# Altium PCB PANEL.PcbDoc
Units mm, origin at the board's own origin, x right, y up, seen from the top; angles counter-clockwise.
Board outline 82 x 85 mm, 2 copper layers (Top Layer, Bottom Layer), stack 1.57 mm thick; 4 components, 0 nets, 8 pads, 0 vias.
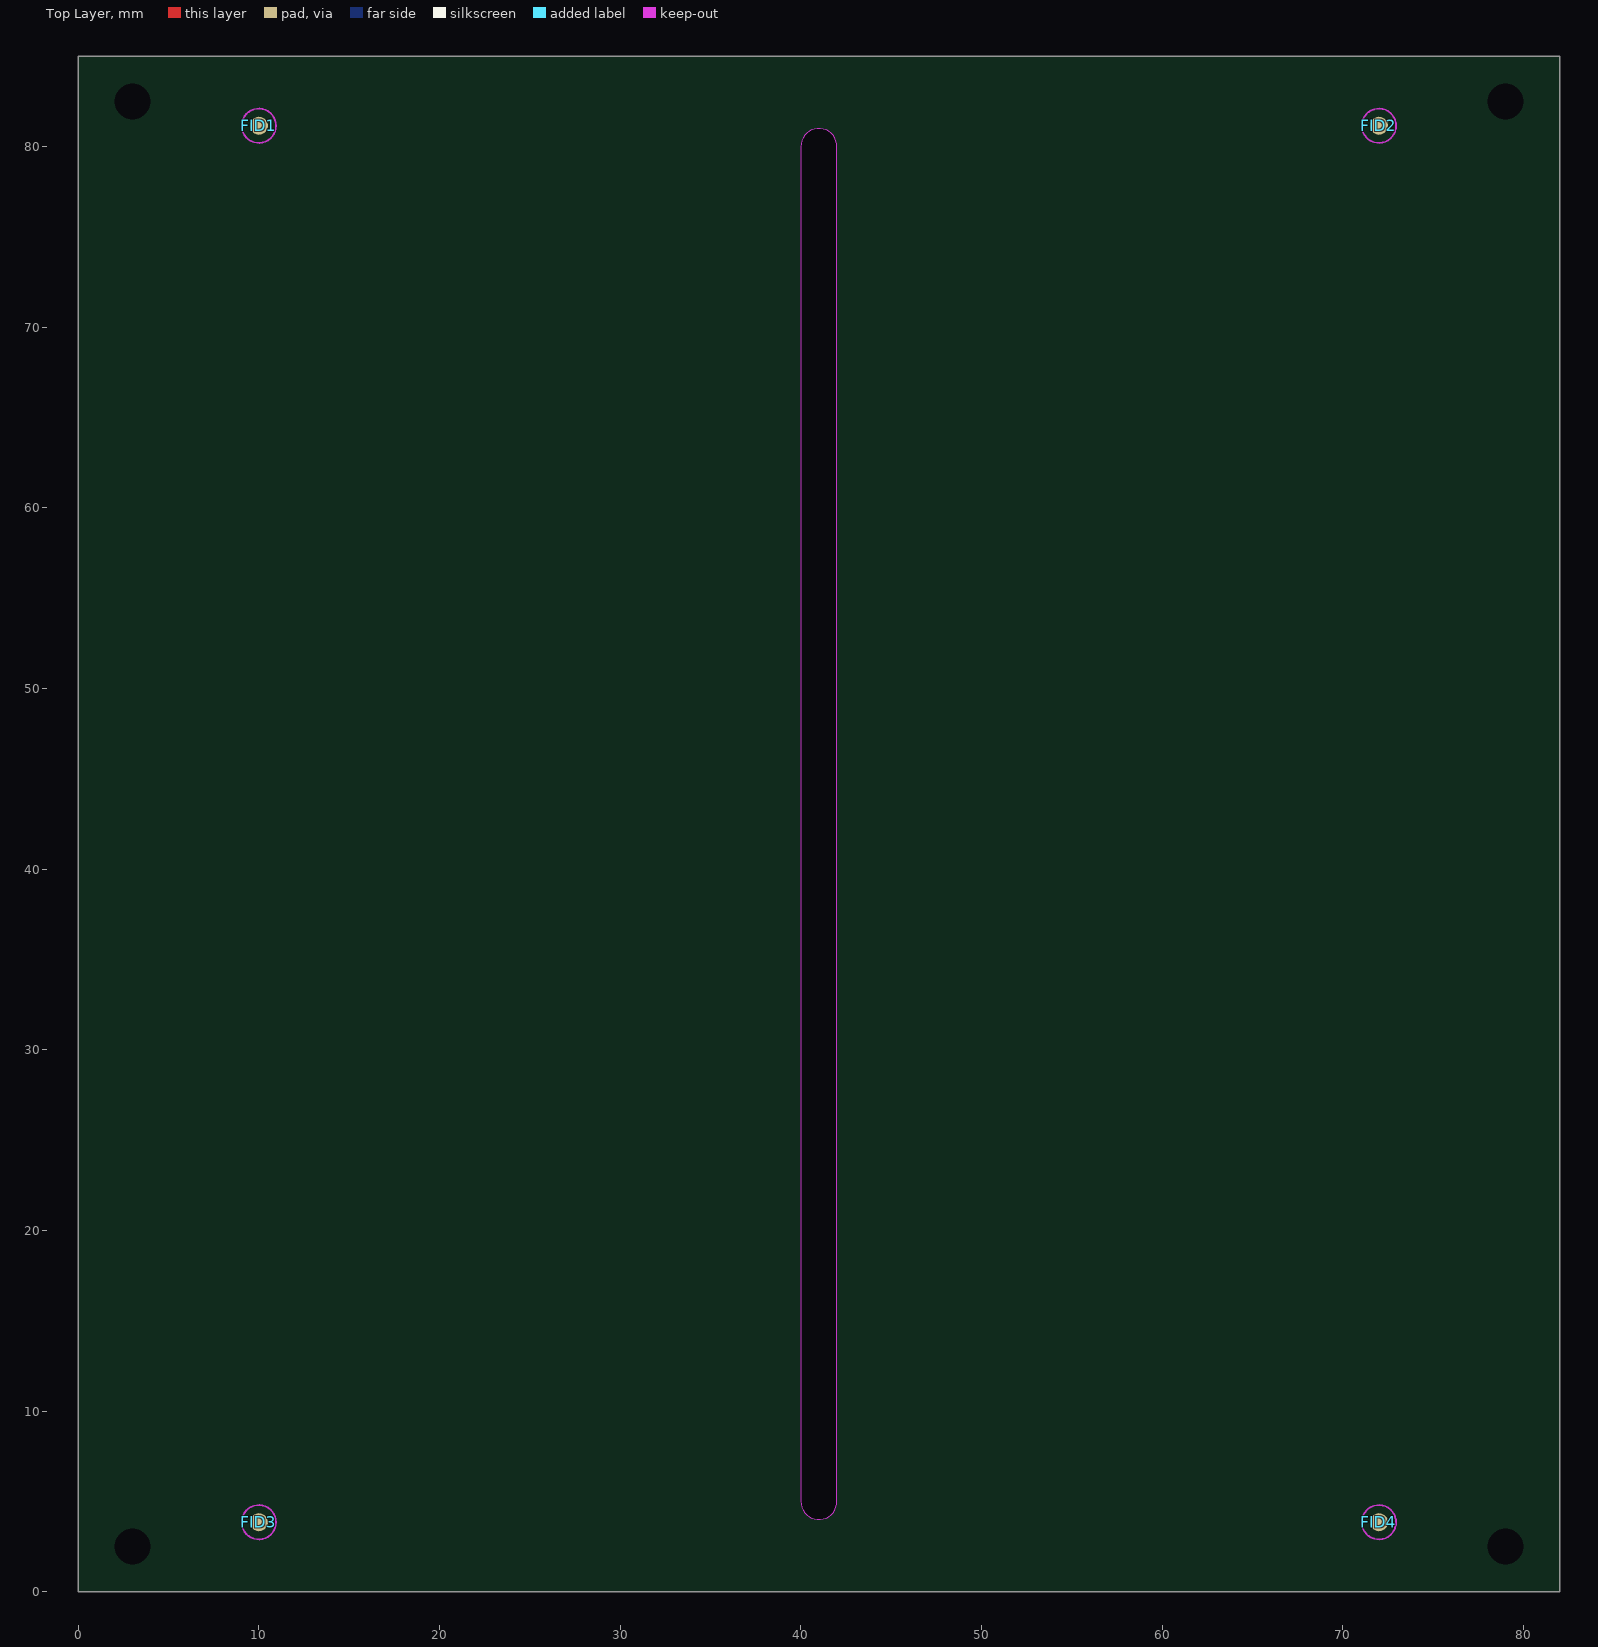
[diagram p0: Top Layer view]
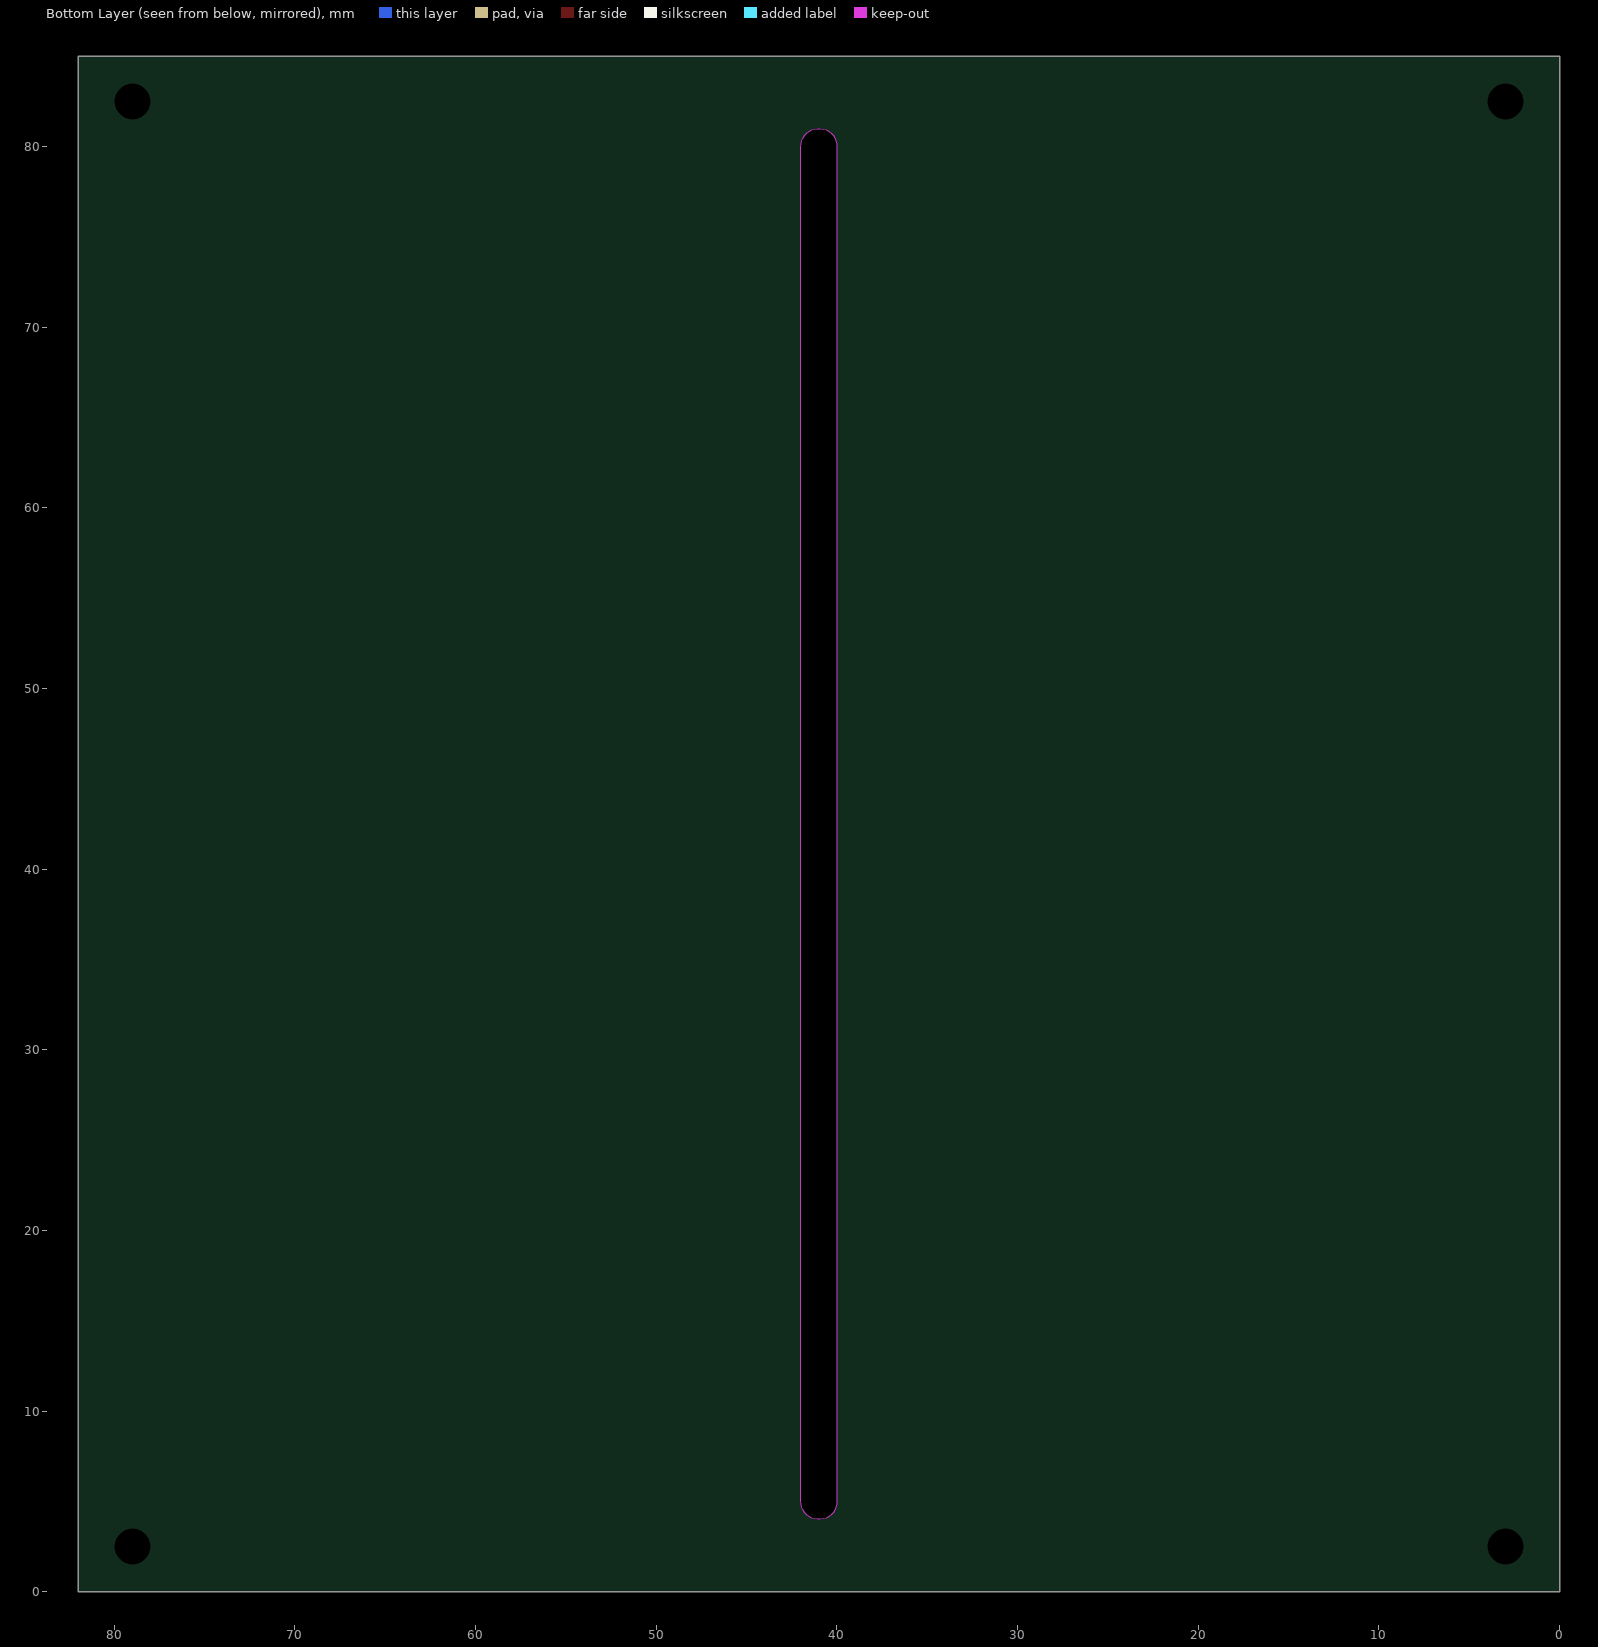
[diagram p1: Bottom Layer view, seen from below]

## Layer stack, top to bottom
Top Solder: solder mask 0.0254, SM-001, Dk 4
Top Layer: signal copper 0.035
Dielectric 1: core 1.5, FR-4 TG140, Dk 3.96
Bottom Layer: signal copper 0.035
Bottom Solder: solder mask 0.0254, SM-001, Dk 4

## Board outline
0,0 0,85 82,85 82,0
cut-out: 40,5 ccw(c41,5) 42,5 42,78 42,80 ccw(c41,80) 40,80 40,77.9

## Design rules (kind name [scope] priority, off if disabled: settings)
AcuteAngle [All] p1: minimum=6.00000000000000E+0001 checktracksonly=TRUE
AssemblyTestpoint [All] p1: testpointundercomponent=TRUE minsize=1 maxsize=2.5 preferedsize=1.5 minholesize=0 maxholesize=1 preferedholesize=0.8 testpointgrid=0.025 usegrid=TRUE gridtolerance=0 allowsidetop=TRUE allowsidebottom=TRUE
BoardOutlineClearance [(OnLayer('Top Layer') OR OnLayer('Bottom Layer'))] p1: gap=1 ignorepadtopadclearanceinfootprint=FALSE
Clearance [All] p1: gap=0.2 ignorepadtopadclearanceinfootprint=FALSE except(0: Arc-Hole Track-Hole SMDPad-Hole THPad-Hole Via-Hole Fill-Hole Poly-Hole Region-Hole Text-Hole)
ComponentClearance ComponentClearance_FID [Footprint Like('FID-1*')] p1: gap=0 collisioncheckmode=3 verticalgap=0 showdistances=FALSE
ComponentClearance [All] p2: gap=0.2 collisioncheckmode=3 verticalgap=0.2 showdistances=FALSE
DiffPairsRouting [All] p1: maxlimit=0.4 minlimit=0.2 mostfreqgap=0.2 toplayer_minwidth=0.3 toplayer_maxwidth=0.4 toplayer_prefwidth=0.3 bottomlayer_minwidth=0.3 bottomlayer_maxwidth=0.4 bottomlayer_prefwidth=0.3 maxuncoupledlength=12
FabricationTestpoint [All] p1: side=3 testpointundercomponent=TRUE minsize=1 maxsize=2.5 preferedsize=1.5 minholesize=0 maxholesize=1 preferedholesize=0.8 testpointgrid=0.025 allowsidetop=TRUE allowsidebottom=TRUE usegrid=TRUE gridtolerance=0
Height [All] p1: minheight=0 maxheight=50 prefheight=12
HoleSize [All] p1: absolutevalues=TRUE maxlimit=6 minlimit=0.3 maxpercent=80.000 minpercent=20.000
HoleToHoleClearance [All] p1: gap=0.3 allowstackedmicrovias=TRUE
MinimumAnnularRing [All] p1: minimumring=0.15
MinimumSolderMaskSliver [All] p1: minsoldermaskwidth=0.15
PlaneClearance [All] p1: clearance=0.3
PlaneConnect PlaneConnect_GND [(InNet('GND') and IsPad)] p1: pad.planeconnectstyle=Relief pad.reliefexpansion=0.3 pad.reliefentries=4 pad.reliefconductorwidth=0.5 pad.reliefairgap=0.2 via.planeconnectstyle=Direct via.reliefexpansion=0.3 via.reliefentries=4 via.reliefconductorwidth=0.5 via.reliefairgap=0.2
PlaneConnect [All] p2: planeconnectstyle=Direct reliefexpansion=0.5 reliefentries=4 reliefconductorwidth=0.2 reliefairgap=0.2
PolygonConnect [All] p1: thpad.connectstyle=Relief thpad.reliefconductorwidth=0.4 thpad.reliefentries=4 thpad.polygonreliefangle="90 Angle" thpad.airgapwidth=0.2 smdpad.connectstyle=Direct smdpad.reliefconductorwidth=0.3 smdpad.reliefentries=4 smdpad.polygonreliefangle="90 Angle" smdpad.airgapwidth=0.2 via.connectstyle=Direct via.reliefconductorwidth=0.2 via.reliefentries=4 via.polygonreliefangle="90 Angle" via.airgapwidth=0.2
RoutingCorners [All] p1: cornerstyle=45-Degree minsetback=0.5 maxsetback=2
RoutingVias [All] p1: holewidth=0.3 width=0.6 viastyle="Through Hole" minholewidth=0.3 minwidth=0.6 maxholewidth=0.6 maxwidth=1
SMDEntry [All] p1: side=TRUE corner=TRUE anyangle=TRUE
SMDToCorner [All] p1: distance=0
SilkToSilkClearance [All] p1: silktosilkclearance=0.1
SilkToSolderMaskClearance [IsPad] p1: minsilkscreentomaskgap=0.1 clearancetoexposedcopper=FALSE
SolderMaskExpansion SolderMaskExpansion-NPTH [PadIsPlated = 'False'] p1: expansion=0.1 istentingtop=FALSE soldermaskfromhole=TRUE
SolderMaskExpansion [All] p2: expansion=0.05 istentingtop=FALSE
SupplyNets SupplyNets_GND [InNet('GND')] p1: voltage=0.000
SupplyNets SupplyNets+5V [InNet('+5V')] p2: voltage=5.000
SupplyNets SupplyNets+3V3 [InNet('+3V3')] p3: voltage=3.300
UnRoutedNet [All] p1: checkbadconnections=TRUE
Width [All] p1: maxlimit=5 minlimit=0.2 preferedwidth=0.2 minimp=50.000000 maximp=50.000000 favimp=50.000000
16 further rules are at their usual default settings.

## Classes and differential pairs
component class "CAN Driver": LNK1
component class IC2: BT1

## Components (designator, comment, footprint, x,y, rotation, side; value= is the part's Value field where it differs from the comment)
FID1 "Comment" FID-1-2MM 10,81.15 r0 top
FID2 "Comment" FID-1-2MM 72,81.15 r0 top
FID3 "Comment" FID-1-2MM 10,3.85 r0 top locked
FID4 "Comment" FID-1-2MM 72,3.85 r0 top

## Footprints (in the part's own frame and the unit in brackets; to place one, negate y for a bottom-side part, rotate by r counter-clockwise, add the part's x,y. Pads: shape width x height; smd on the part's side, far side on the other; paste and mask are expansions set on the pad)
FID-1-2MM [mm] "Fiducial 1.0mm Diameter, 2.0mm Mask"
  round 1 smd paste-1 mask+0.5: F(0,0)
  Top Layer keep-out circle w0.1: c0,0 r0.95

## Free pads (board coordinates)
  round 0 hole 2 unplated: RH(3,2.5) RH(3,82.5) RH(79,2.5) RH(79,82.5)

## Nets (pads, with @x,y where several pads share a name; then routed paths per layer and width w, separated by ;. In a path a pad name is that pad's centre, name@x,y a point inside that pad or via, vN(x,y) a via of type N, cw(c..) or ccw(c..) an arc to the next point about the centre after c; other vN are vias at no path point)
pads on no net: FID1.F FID2.F FID3.F FID4.F

## Silkscreen, mask and mechanical layers (free items; w line width, h text height)
Board Outline:
  lines w1.2: -0.6,5 ccw(c0,5) 0,4.4 ; -0.6,5 ccw(c0,5) 0,4.4 ; -0.6,5 -0.6,20 -0.6,35 -0.6,50 -0.6,65 -0.6,80 ; -0.6,80 cw(c0,80) 0,80.6 ; -0.6,80 cw(c0,80) 0,80.6 ; 0,4.4 40,4.4 ; 0,80.6 40,80.6 ; 40,4.4 ccw(c40,5) 40.6,5 ; 40,4.4 ccw(c40,5) 40.6,5 ; 40,80.6 cw(c40,80) 40.6,80 ; 40,80.6 cw(c40,80) 40.6,80 ; 40.6,5 40.6,19.998 ; 40.6,19.998 ccw(c40,20) 40.6,20 ; 40.6,19.998 ccw(c40,20) 40.6,20 ; 40.6,19.998 40.6,20 ; 40.6,20 40.6,34.998 ; 40.6,34.998 ccw(c40,35) 40.6,35 ; 40.6,34.998 ccw(c40,35) 40.6,35 ; 40.6,34.998 40.6,35 ; 40.6,35 40.6,49.998 ; 40.6,49.998 ccw(c40,50) 40.6,50 ; 40.6,49.998 ccw(c40,50) 40.6,50 ; 40.6,49.998 40.6,50 ; 40.6,50 40.6,64.998 ; 40.6,64.998 ccw(c40,65) 40.6,65 ; 40.6,64.998 ccw(c40,65) 40.6,65 ; 40.6,64.998 40.6,65 ; 40.6,65 40.6,80 ; 41.4,5 ccw(c42,5) 42,4.4 ; 41.4,5 ccw(c42,5) 42,4.4 ; 41.4,5 41.4,20 41.4,35 41.4,50 41.4,65 41.4,80 ; 41.4,80 cw(c42,80) 42,80.6 ; 41.4,80 cw(c42,80) 42,80.6 ; 42,4.4 82,4.4 ; 42,80.6 82,80.6 ; 82,4.4 ccw(c82,5) 82.6,5 ; 82,4.4 ccw(c82,5) 82.6,5 ; 82,80.6 cw(c82,80) 82.6,80 ; 82,80.6 cw(c82,80) 82.6,80 ; 82.6,5 82.6,19.998 ; 82.6,19.998 ccw(c82,20) 82.6,20 ; 82.6,19.998 ccw(c82,20) 82.6,20 ; 82.6,19.998 82.6,20 ; 82.6,20 82.6,34.998 ; 82.6,34.998 ccw(c82,35) 82.6,35 ; 82.6,34.998 ccw(c82,35) 82.6,35 ; 82.6,34.998 82.6,35 ; 82.6,35 82.6,49.998 ; 82.6,49.998 ccw(c82,50) 82.6,50 ; 82.6,49.998 ccw(c82,50) 82.6,50 ; 82.6,49.998 82.6,50 ; 82.6,50 82.6,64.998 ; 82.6,64.998 ccw(c82,65) 82.6,65 ; 82.6,64.998 ccw(c82,65) 82.6,65 ; 82.6,64.998 82.6,65 ; 82.6,65 82.6,80
Panel Outline:
  lines w0.1: 0,0 82,0 82,85 0,85 0,0 ; 40,5 ccw(c41,5) 42,5 42,78 42,80 ccw(c41,80) 40,80 40,77.9 40,5
  lines w0.2: 0,5 40,5 ; 0,20 40,20 ; 0,35 40,35 ; 0,50 40,50 ; 0,65 40,65 ; 0,80 40,80 ; 4.5,-12 4.5,-1 ; 4.5,5 4.5,80 ; 42,5 82,5 ; 42,20 82,20 ; 42,35 82,35 ; 42,50 82,50 ; 42,65 82,65 ; 42,80 82,80 ; 46.5,-12 46.5,-1 ; 46.5,5 46.5,80 ; 83,5 94,5 ; 83,20 94,20 ; 83,35 94,35 ; 83,50 94,50 ; 83,65 94,65 ; 83,80 94,80
  text "V-CUT" at 84.4,80.7 h1.6
  text "V-CUT" at 84.4,65.7 h1.6
  text "V-CUT" at 84.4,50.7 h1.6
  text "V-CUT" at 84.4,35.7 h1.6
  text "V-CUT" at 84.4,20.7 h1.6
  text "V-CUT" at 84.4,5.7 h1.6
  text "V-CUT" at 5.2,-2.4 h1.6 r270
  text "V-CUT" at 47.2,-2.4 h1.6 r270
Top Courtyard:
  lines w0.1: 0,12.55 0,14.45 ; 0,13.5 0.85,13.5 ; 0,95.55 0,97.45 ; 0,96.5 0.85,96.5 ; 13.5,52 14.5,52 ; 13.5,58 14.5,58 ; 14,52 14,52.5 ; 14,57.5 14,58 ; 15,54.5 15,55.5 ; 15,55 15.5,55 ; 46.5,97 46.5,98 ; 46.5,97.5 47,97.5 ; 49,96.5 50,96.5 ; 49.5,96 49.5,96.5 ; 52,97.5 52.5,97.5 ; 52.5,12 52.5,13 ; 52.5,12.5 53,12.5 ; 52.5,97 52.5,98 ; 55,13.5 56,13.5 ; 55.5,13.5 55.5,14 ; 58,12.5 58.5,12.5 ; 58.5,12 58.5,13 ; 97.5,12 97.5,13 ; 97.5,12.5 98,12.5 ; 99.4,97 99.4,98 ; 99.4,97.5 99.9,97.5 ; 100,13.5 101,13.5 ; 100.5,13.5 100.5,14 ; 101.9,96.5 102.9,96.5 ; 102.4,96 102.4,96.5 ; 103,12.5 103.5,12.5 ; 103.5,12 103.5,13 ; 104.9,97.5 105.4,97.5 ; 105.4,97 105.4,98 ; 151.5,12 151.5,13 ; 151.5,12.5 152,12.5 ; 152,97 152,98 ; 152,97.5 152.5,97.5 ; 154,13.5 155,13.5 ; 154.5,13.5 154.5,14 ; 154.5,96.5 155.5,96.5 ; 155,96 155,96.5 ; 157,12.5 157.5,12.5 ; 157.5,12 157.5,13 ; 157.5,97.5 158,97.5 ; 158,97 158,98 ; 184.5,55 185,55 ; 185,54.5 185,55.5 ; 185.5,52 186.5,52 ; 185.5,58 186.5,58 ; 186,52 186,52.5 ; 186,57.5 186,58 ; 199.15,13.5 200,13.5 ; 199.15,96.5 200,96.5 ; 200,12.55 200,14.45 ; 200,95.55 200,97.45
Route Tool Path:
  lines w2: 41,5 41,80

## Panel: embedded boards
"USB-SW.PcbDoc" at 0,5, 5 rows x 2 columns, spacing 15 x 42, rotation 0